# Altium PCB MAX_2870.PcbDoc (part 2 of 2)
Units mil, origin at the board's own origin, x right, y up, seen from the top; angles counter-clockwise.
Board outline 2360 x 1590 mil, 4 copper layers (Component Side, Ground Plane, Power Plane, Solder Side), stack 33.234 mil thick; 80 components, 61 nets, 332 pads, 500 vias.
Unrouted connection lines stored in the file: 26.
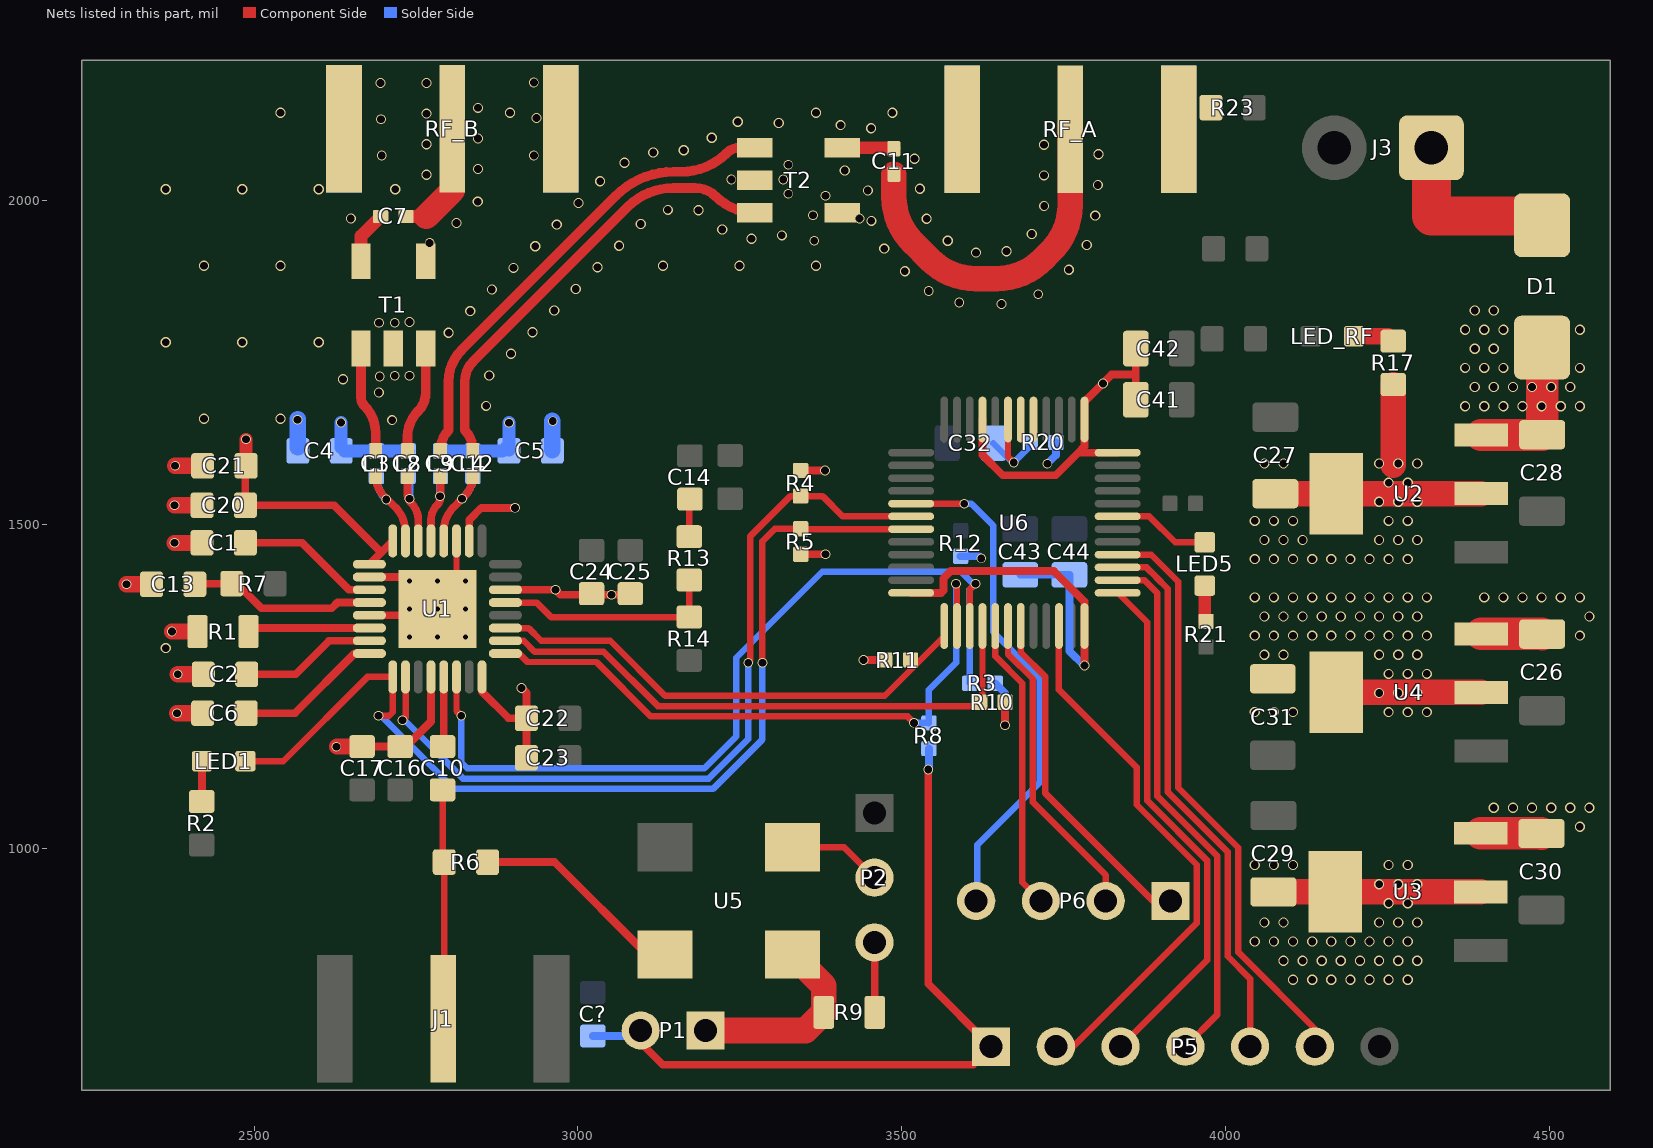
[diagram p4: the nets of this part, all layers, seen from the top]

## Via types
v1: diameter 15.75, hole 11.81, Component Side to Solder Side, 391 vias
v2: diameter 15, hole 12, Component Side to Solder Side, 96 vias
v3: diameter 19.68, hole 7.87, Component Side to Solder Side, 9 vias
v4: diameter 157.48, hole 118.11, Component Side to Solder Side, 4 vias

## Nets (pads, with @x,y where several pads share a name; then routed paths per layer and width w, separated by ;. In a path a pad name is that pad's centre, name@x,y a point inside that pad or via, vN(x,y) a via of type N, cw(c..) or ccw(c..) an arc to the next point about the centre after c; other vN are vias at no path point) (continued)
GND_RF: C1.2 C2.1 C4.2 C5.2 C6.1 C13.2 C20.2 C21.2 R1.2 R23.1 RF_A. RF_A.MP RF_B. RF_B.MP T1.1 T1.4 T2.1 T2.4 U1.11 U1.18 U1.21 U1.33 | length 726.3
  Component Side w10: v3(2783,1370) 2812.53,1399.53 U1.11@2812.53,1475.08
  Component Side w12: U1.21@2677.92,1360.16 2773.16,1360.16 v3(2783,1370) v3(2739.69,1413.31) 2733.79,1419.21 U1.18@2677.92,1419.21
  Component Side w25: v2(2303,1408) C13.2@2341.54,1408 ; v2(2373,1335) R1.2@2412.63,1335 ; v2(2376.93,1472) C1.2@2419.54,1472 ; v2(2377,1530) C20.2@2419.54,1530 ; v2(2378,1591) C21.2@2420.54,1591 ; v2(2381,1209) C6.1@2420.54,1209 ; v2(2382,1269) C2.1@2421.54,1269
  Solder Side w25: C4.2@2567.31,1619.33 v2@2567.31,1663.31 ; C5.2@2960.46,1615 v2@2960.46,1660.46
  other v1: 2363.62,1309.45 2713.1,1661.59 2422.68,1663.78 2540.79,1663.78 2858.28,1683.49 2692.72,1704.21 2637.28,1724.74 2863.16,1730.48 2896.56,1763.88 2363.62,1781.89 2481.73,1781.89 2599.84,1781.89 2800.39,1796.43 2929.97,1797.29 2833.8,1829.83 2963.38,1830.7 2867.2,1863.24 2996.78,1864.1 3504.88,1891.35 3758.14,1893.69 2900.61,1896.65 3030.19,1897.51 2422.68,1900 2540.79,1900 3131.34,1900 3249.45,1900 3367.56,1900 3614.74,1920.14 3661.94,1922.23 3473.15,1926.36 2934.02,1930.05 3063.6,1930.92 3785.82,1931.97 3571.23,1938.54 3267.99,1941.68 3314.96,1946.75 3700.83,1949.05 3222.95,1955.93 2967.42,1963.46 3097,1964.32 2812.52,1966.01 3453.21,1969.19 2649.48,1972.96 3538.48,1972.59 3798.92,1977.36 3138.92,1986.12 3186.16,1985.58 3719.92,1992.27 3000.83,1996.87 2845.35,1999 3447.86,2016.13 2363.62,2018.11 2481.73,2018.11 2599.84,2018.11 2717.95,2018.11 3528.14,2018.69 3803,2024.62 3034.24,2030.27 2766.24,2040.33 3719.86,2039.51 3412.07,2046.97 2845.76,2049.22 3071.86,2058.84 3519.85,2065.2 3803.92,2072 3116.3,2074.88 3163.42,2078.42 3719.86,2086.76 2766.24,2087.57 2845.76,2096.46 3206.63,2097.5 3452.72,2112.11 3405.74,2117.03 3310.26,2120.39 3246.84,2122.32 2766.24,2134.81 2540.79,2136.22 2895.12,2136.22 3367.56,2136.22 3485.67,2136.22 2845.76,2143.71 2766.24,2182.06
  other v2: 2961,1660 2567,1662 2694,1729 2717,1730 2740,1730 2693,1812 2717,1812 2740,1813 3654,1841 3589,1843 3711,1856 3541.68,1861 2771,1935 3365,1938.54 3435,1973 3363,1978 3382.47,2008 3325,2011 3237,2033 3317,2033 3325,2056 2697,2070 2932,2070 2696,2126 2936,2128 2695,2182 2932,2183
  other v3: 2739.69,1326.69 2783,1326.69 2826.31,1326.69 2739.69,1370 2826.31,1370 2783,1413.31 2826.31,1413.31
JTCK: P5.3 U6.37 | length 813.2
  Component Side w10: U6.37@3833.45,1394.73 3879,1349.18 3879,1074 3971.53,981.47 3971.53,827.53 P5.3@3838,694
JTDI: P5.4 U6.38 | length 829.1
  Component Side w10: U6.38@3833.45,1414.42 3874.94,1414.42 3895,1394.36 3895,1080.63 3987.53,988.1 3987.53,743.53 P5.4@3938,694
JTDO: P5.5 U6.39 | length 851.2
  Component Side w10: U6.39@3833.45,1434.1 3878.08,1434.1 3893,1419.18 3892.82,1419.18 3911,1401 3911,1087.25 4003.53,994.73 4003.53,833.47 4038,799 P5.5@4038,694
JTMS: P5.2 U6.34 | length 843.3
  Component Side w10: P5.2@3738,694 3764.61,694 3949.08,878.47 3955.53,884.92 3955.53,974.85 3863,1067.37 3863,1125.18 3742.9,1245.28 U6.34@3742.9,1343.55
JTRST#: P5.6 U6.40 | length 921.2
  Component Side w10: U6.40@3833.45,1453.79 3885.21,1453.79 3927,1412 3927,1093.88 4019.53,1001.35 4019.53,840.1 4144,715.63 4144,700 P5.6@4138,694
LD: LED1.A R5.1 U1.25 U6.19 | length 1572
  Component Side w10: LED1.A@2486.46,1134.87 2544.87,1134.87 2674.92,1264.92 U1.25@2714.1,1264.92 2714.1,1210.6 2708.5,1205 v2(2692,1205) ; v2(3285,1287) 3285,1474.46 3304.22,1493.68 R5.1@3344,1493.68 ; R5.1@3349,1497.32 3353.16,1493.16 U6.19@3514.55,1493.16
  Solder Side w10: v2(2692,1205) 2695.84,1205 2808.84,1092 3208.63,1092 3285,1168.37 v2(3285,1287)
LDout: P6.4 U6.17 | length 793.4
  Component Side w10: U6.17@3514.55,1532.53 v2(3596.53,1532.53)
  Solder Side w10: v2(3596.53,1532.53) 3607.64,1532.53 3641.5,1498.66 3641.5,1334.5 3713.43,1262.57 3713.43,1102.43 3617,1006 P6.4@3617,916
LO_N: C9.2 T2.3 | length 735.6
  Component Side w15: C9.2@2787.78,1614.02 2787.78,1615.65 cw(c2830.45,1615.65) 2800.28,1645.83 2800.28,1721.28 cw(c2868.72,1721.28) 2820.32,1769.68 3059.03,2008.39 cw(c3147.42,1920) 3147.42,2045 3159.52,2045 ccw(c3159.52,2145) 3230.23,2074.29 cw(c3248.85,2055.67) 3248.85,2082 T2.3@3273,2082
LO_P: C12.2 T2.5 | length 696.6
  Component Side w15: C12.2@2837.78,1614.02 2837.78,1615.65 ccw(c2795.1,1615.65) 2825.28,1645.83 2825.28,1721.28 cw(c2868.72,1721.28) 2838,1752 3076.71,1990.71 cw(c3147.42,1920) 3147.42,2020 3181.26,2020 cw(c3181.26,1974.9) 3213.15,2006.79 ccw(c3273,2066.64) T2.5@3273,1982
MISO: R3.1 U1.30 U6.27 | length 1364.1
  Component Side w10: U1.30@2812.53,1264.92 2812.53,1212.47 v2(2820,1205) ; U6.27@3605.1,1343.55 3605.1,1400.1 v2(3614,1409)
  Solder Side w10: v2(2820,1205) 2820,1133.14 2829.14,1124 3195.37,1124 3244.5,1173.13 3244.5,1294.66 3377.34,1427.5 3591.66,1427.5 3610.16,1409 v2(3614,1409) 3605.1,1400.1 R3.1@3605.1,1255
MOSI: R10.2 U1.2 U6.28 | length 892.9
  Component Side w10: U1.2@2888.08,1320.79 2916.21,1320.79 2933,1304 3039.57,1304 3123.57,1220 3609.32,1220 3624.79,1235.47 U6.28@3624.79,1343.55
NetC1_1: C1.1 U1.19 | length 221.5
  Component Side w12: C1.1@2486.46,1472 2574,1472 2646.47,1399.53 U1.19@2677.92,1399.53
NetC2_2: C2.2 U1.23 | length 210.9
  Component Side w12: C2.2@2488.46,1269 2564,1269 2615.79,1320.79 U1.23@2677.92,1320.79
NetC3_1: C3.1 L1.2 U1.15 | length 154.3
  Component Side w12: C3.1@2687.78,1574.65 ccw(c2729.84,1574.65) 2700.09,1544.91 2718,1527 cw(c2679.89,1488.89) 2733.79,1488.89 U1.15@2733.79,1475.08
  Solder Side w12: L1.2@2688.78,1574.65 ccw(c2738.09,1574.65) 2703.22,1539.78 v2(2704,1539)
NetC6_2: C6.2 U1.24 | length 228.6
  Component Side w12: C6.2@2487.46,1209 2563,1209 2655.1,1301.1 U1.24@2677.92,1301.1
NetC7_1: C7.1 T1.2 | length 81.6
  Component Side w20: T1.2@2665,1907 2665,1945.68 C7.1@2695.32,1976
NetC7_2: C7.2 RF_B.1 | length 191.5
  Component Side w20: C7.2@2734.68,1976 2766,1976 ; RF_B.1@2806,2016 RF_B.1@2806,2119.57
  Component Side w39.02: 2766,1976 RF_B.1@2806,2016
NetC8_1: C8.1 L2.2 U1.14 | length 139.3
  Component Side w12: C8.1@2736.78,1574.65 2736.78,1548.03 ccw(c2758.03,1548.03) 2743,1533 cw(c2717.72,1507.72) 2753.47,1507.72 U1.14@2753.47,1475.08
  Solder Side w12: L2.2@2737.78,1574.65 cw(c2732.41,1569.28) 2740,1569.28 v2(2740,1540)
NetC9_1: C9.1 L3.2 U1.13 | length 134.3
  Component Side w12: U1.13@2773.16,1475.08 2773.16,1507.24 cw(c2806.76,1507.24) 2783,1531 ccw(c2771.47,1542.53) 2787.78,1542.53 C9.1@2787.78,1574.65
  Solder Side w12: v2(2787,1544) 2787,1572.78 cw(c2789.65,1572.78) L3.2@2787.78,1574.65
NetC10_1: C10.1 J1.1 R6.2 | length 363.8
  Component Side w10: C10.1@2791,1090.54 2791,981.54 R6.2@2793.54,979 2793.54,736.89 J1.1@2800,730.43
NetC10_2: C10.2 U1.29 | length 108.2
  Component Side w12: C10.2@2791,1157.46 2792.84,1159.31 U1.29@2792.84,1264.92
NetC11_1: C11.1 T2.2 | length 80.4
  Component Side w19.68: T2.2@3408,2082 3484.83,2082 cw(c3484.83,2077.51) C11.1@3488,2080.68
NetC11_2: C11.2 RF_A.1 | length 562.7
  Component Side w39.37: C11.2@3488,2041.32 3488,2006.42 ccw(c3588,2006.42) 3517.29,1935.71 3543.71,1909.29 ccw(c3614.42,1980) 3614.42,1880 3646.58,1880 ccw(c3646.58,1980) 3717.29,1909.29 3730.71,1922.71 ccw(c3660,1993.42) 3760,1993.42 RF_A.1@3760,2118.57
NetC12_1: C12.1 L4.2 U1.12 | length 153.9
  Component Side w12: U1.12@2792.84,1475.08 2792.84,1490.41 cw(c2844.59,1490.41) 2808,1527 v2(2821,1540) 2825.14,1544.14 ccw(c2794.62,1574.65) C12.1@2837.78,1574.65
  Solder Side w12: v2(2821,1540) 2825.14,1544.14 ccw(c2794.62,1574.65) L4.2@2837.78,1574.65
NetC14_2: C14.2 R13.1 | length 58.5
  Component Side w10: R13.1@3172,1481.46 3172,1538.54 C14.2@3173,1539.54
NetC33_2: U6.5
NetC34_2: U6.6 | length 14.3
  Component Side w10: U6.6@3683.84,1662.45 U6.6@3683.84,1676.71
NetD1_A: D1.A J3.1 | length 276.5
  Component Side w60: J3.1@4318,2082 4318,1976.49 D1.A@4489,1976.49
NetLED1_K: LED1.K R2.2 | length 62.6
  Component Side w12: R2.2@2419,1072.46 2419.54,1073 LED1.K@2419.54,1134.87
NetLED5_A: LED5.A U6.43 | length 151.1
  Component Side w10: U6.43@3833.45,1512.84 3882.46,1512.84 3922.38,1472.93 LED5.A@3968,1472.93
NetLED5_K: LED5.K R21.1 | length 57.3
  Component Side w20: LED5.K@3968,1406 3968,1350.68 R21.1@3970,1350.68
NetLED_DIG_A: 
NetLED_PLL_A: 
NetLED_RF_A: LED_RF.A R17.2 | length 63.7
  Component Side w25: LED_RF.A@4198.46,1791 4251.46,1791 R17.2@4259,1783.46
NetP1_1: P1.1 R9.1 U5.2 | length 303.5
  Component Side w40: P1.1@3197,719 3351.63,719 R9.1@3379.63,747 3379.63,788.12 U5.2@3331.43,836.32
NetP2_2: P2.2 U5.3 | length 145.9
  Component Side w10: U5.3@3331.43,1001.68 3411.32,1001.68 P2.2@3458,955
NetP2_3: P2.3 R9.2 | length 108.2
  Component Side w12: P2.3@3458,855 3458.37,854.63 R9.2@3458.37,747
NetR1_1: R1.1 U1.22 | length 188.8
  Component Side w12: R1.1@2491.37,1335 2496.84,1340.47 U1.22@2677.92,1340.47
NetR6_1: R6.1 U5.1 | length 333.2
  Component Side w12: R6.1@2860.46,979 2964,979 3106.68,836.32 U5.1@3134.57,836.32
RESET: C32.2 R20.1 U6.7 | length 155.8
  Component Side w10: U6.7@3664.16,1662.45 3664.16,1604.84 v2(3673,1596)
  Solder Side w10: C32.2@3641.43,1626 3671.43,1596 v2(3673,1596) 3698.75,1621.75 R20.1@3698.75,1627
RF_EN: R4.1 U1.26 U6.18 | length 1267.1
  Component Side w10: v2(2729,1198) 2733.79,1202.79 U1.26@2733.79,1264.92 ; v2(3263,1287) 3266.5,1290.5 3266.5,1482.5 3328.32,1544.32 R4.1@3344,1544.32 3377.68,1544.32 3409.16,1512.84 U6.18@3514.55,1512.84
  Solder Side w10: v2(2729,1198) 2732.51,1198 2822.51,1108 3202,1108 3263,1169 v2(3263,1287)
RF_N: C3.2 T1.3 | length 164.1
  Component Side w15: T1.3@2665,1772 2665,1696.07 ccw(c2682.07,1696.07) 2670,1684 cw(c2627.09,1641.09) 2687.78,1641.09 C3.2@2687.78,1614.02
RF_P: C8.2 T1.5 | length 165.5
  Component Side w15: C8.2@2736.78,1614.02 2736.78,1635.83 cw(c2792.17,1635.83) 2753,1675 ccw(c2724.03,1703.97) 2765,1703.97 T1.5@2765,1772
RX: P6.1 U6.31 | length 536.1
  Component Side w10: U6.31@3683.84,1343.55 3683.84,1303.12 3722,1264.96 3722,1085 3888,919 P6.1@3915,919
SCK: R8.2 U1.1 U6.26 | length 997.2
  Component Side w10: U1.1@2888.08,1301.1 2908.9,1301.1 2922,1288 3028.57,1288 3112.57,1204 3509,1204 v2(3519,1194) ; v2(3584,1409) 3585.42,1407.58 U6.26@3585.42,1343.55
  Solder Side w10: v2(3519,1194) 3541.68,1194 R8.2@3542,1193.68 3542,1245 3584,1287 v2(3584,1409)
SS: R11.2 U1.3 U6.25 | length 774.7
  Component Side w10: U1.3@2888.08,1340.47 2923.53,1340.47 2943.21,1320.79 3049.79,1320.79 3134.57,1236 3474,1236 3565.73,1327.73 U6.25@3565.73,1343.55
SW: R13.2 R14.1 U1.5 | length 350.3
  Component Side w10: U1.5@2888.08,1379.84 2936.16,1379.84 2958.54,1357.46 R14.1@3172,1357.46 R13.2@3172,1414.54
trig: P6.3 U6.29 | length 453.8
  Component Side w10: U6.29@3644.47,1343.55 3644.47,1297.23 3686.32,1255.39 3686.32,947.68 P6.3@3715,919
TUNE: C13.1 R7.1 U1.20 | length 289.3
  Component Side w12: C13.1@2408.46,1408 2409.46,1409 R7.1@2465.54,1409 2473.37,1409 2511.37,1371 2620,1371 2628.84,1379.84 U1.20@2677.92,1379.84
TX: P6.2 U6.30 | length 487
  Component Side w10: U6.30@3664.16,1343.55 3664.16,1300.18 3702.32,1262.02 3702.32,1071.68 3815,959 P6.2@3815,919
VCC_12V: C26.1 C28.1 C30.1 D1.K U2.3 U3.3 U4.3 | length 430.6
  Component Side w50: U3.3@4394.2,1023.55 4486.8,1023.55 cw(c4486.8,1021.86) C30.1@4488,1023.06 ; U4.3@4395.2,1331.55 4487.8,1331.55 cw(c4487.8,1329.86) C26.1@4489,1331.06 ; U2.3@4395.2,1638.55 4489,1638.55 D1.K@4489,1787.51
  other v1: 4547.25,1033.47 4547.25,1033.47 4414.38,1062.99 4414.38,1062.99 4443.9,1062.99 4443.9,1062.99 4473.43,1062.99 4473.43,1062.99 4502.96,1062.99 4502.96,1062.99 4532.49,1062.99 4532.49,1062.99 4562.01,1062.99 4562.01,1062.99 4547.25,1328.74 4547.25,1328.74 4562.01,1358.27 4562.01,1358.27 4399.61,1387.8 4399.61,1387.8 4429.14,1387.8 4429.14,1387.8 4458.67,1387.8 4458.67,1387.8 4488.2,1387.8 4488.2,1387.8 4517.72,1387.8 4517.72,1387.8 4547.25,1387.8 4547.25,1387.8 4370.08,1683.07 4399.61,1683.07 4429.14,1683.07 4458.67,1683.07 4488.2,1683.07 4517.72,1683.07 4547.25,1683.07 4384.85,1712.6 4414.38,1712.6 4443.9,1712.6 4473.43,1712.6 4502.96,1712.6 4532.49,1712.6 4370.08,1742.13 4370.08,1742.13 4370.08,1742.13 4399.61,1742.13 4399.61,1742.13 4399.61,1742.13 4429.14,1742.13 4429.14,1742.13 4429.14,1742.13 4547.25,1742.13 4547.25,1742.13 4547.25,1742.13 4384.85,1771.66 4384.85,1771.66 4384.85,1771.66 4414.38,1771.66 4414.38,1771.66 4414.38,1771.66 4370.08,1801.18 4370.08,1801.18 4370.08,1801.18 4399.61,1801.18 4399.61,1801.18 4399.61,1801.18 4429.14,1801.18 4429.14,1801.18 4429.14,1801.18 4547.25,1801.18 4547.25,1801.18 4547.25,1801.18 4384.85,1830.71 4384.85,1830.71 4384.85,1830.71 4414.38,1830.71 4414.38,1830.71 4414.38,1830.71
VCC_DIG: C16.1 C17.1 C31.1 C41.2 C42.2 C43.2 C44.2 C?.1 P1.2 P5.1 R3.2 R4.2 R5.2 R8.1 R10.1 R11.1 R12.1 R20.2 U1.28 U4.2 U4.4 U6.1 U6.9 U6.24 U6.36 U6.48 | length 3091.8
  Component Side w12: C17.1@2666.68,1157.46 C16.1@2725.41,1157.46 2734.46,1157.46 2773.16,1196.16 U1.28@2773.16,1264.92 ; P1.2@3097,719 3097,700 3131,666 3610,666 P5.1@3638,694 3541,791 v2(3541,1122) ; R5.2@3344,1454.32 v2(3382.47,1454.32) ; R4.2@3344,1583.68 v2(3381.68,1583.68) ; v2(3441,1291) R11.1@3474.32,1291 ; U6.24@3514.55,1394.73 3560.92,1394.73 3564.5,1398.32 3564.5,1417.08 3575.92,1428.5 3735.08,1428.5 3782.27,1381.31 U6.36@3782.27,1343.55 v2(3782.27,1282.46) ; U6.9@3624.79,1662.45 3624.79,1607.68 3655.97,1576.5 3737.99,1576.5 3772.75,1611.27 ; v2(3659.68,1190.32) R10.1@3659.68,1226 ; U6.48@3833.45,1611.27 3772.75,1611.27 ; 3860,1732 3824.18,1732 3782.27,1690.09 U6.1@3782.27,1662.45 3782.27,1620.78 3772.75,1611.27 ; C41.2@3861.57,1693 C42.2@3861.57,1772
  Component Side w25: v2@2628,1157.46 C17.1@2666.68,1157.46
  Component Side w39.37: U4.4@4170.8,1241 U4.2@4395.2,1241
  Solder Side w12: C?.1@3023,710.54 3088.54,710.54 P1.2@3097,719 ; v2@3542,1121 R8.1@3542,1154.32 ; R12.1@3591,1451.32 3619.68,1451.32 v2(3623,1448) ; R3.2@3644.47,1255 3659.68,1239.79 v2(3659.68,1190.32) ; C43.2@3683,1422.57 C44.2@3759,1422.57 3759,1305 v2@3782,1282 ; v2(3725,1594) 3738.12,1607.12 R20.2@3738.12,1627
  other v1: 4045.28,1210.63 4074.81,1210.63 4104.34,1210.63 4251.97,1210.63 4281.5,1210.63 4311.03,1210.63 4237.21,1240.16 4266.74,1240.16 4296.27,1240.16 4251.97,1269.69 4281.5,1269.69 4311.03,1269.69 4060.05,1299.21 4089.57,1299.21 4237.21,1299.21 4266.74,1299.21 4296.27,1299.21 4045.28,1328.74 4074.81,1328.74 4104.34,1328.74 4133.86,1328.74 4163.39,1328.74 4192.92,1328.74 4222.45,1328.74 4251.97,1328.74 4281.5,1328.74 4311.03,1328.74 4060.05,1358.27 4089.57,1358.27 4119.1,1358.27 4148.63,1358.27 4178.16,1358.27 4207.68,1358.27 4237.21,1358.27 4266.74,1358.27 4296.27,1358.27 4045.28,1387.8 4074.81,1387.8 4104.34,1387.8 4133.86,1387.8 4163.39,1387.8 4192.92,1387.8 4222.45,1387.8 4251.97,1387.8 4281.5,1387.8 4311.03,1387.8
  other v2: 2627,1157 3811,1718
VCC_PLL: C22.1 C23.1 C24.1 C25.1 C29.1 U1.6 U1.10 U1.32 U3.2 U3.4 | length 847.2
  Component Side w12: U1.10@2832.21,1475.08 2832.21,1507.21 2851,1526 v2(2903,1526) ; U1.32@2851.9,1264.92 2851.9,1242.1 2893,1201 C22.1@2920.54,1201 ; U1.6@2888.08,1399.53 v2(2965.47,1399.53) 2973,1392 3079.46,1392 C25.1@3081,1393.54 ; v2(2913,1248) 2920.54,1240.46 C22.1@2920.54,1201 ; C23.1@2920.54,1140 C22.1@2920.54,1201
  Component Side w39.37: C29.1@4074,932.94 4074.05,933 U3.4@4169.8,933 U3.2@4394.2,933
  other v1: 4104.34,797.25 4133.86,797.25 4163.39,797.25 4192.92,797.25 4222.45,797.25 4251.97,797.25 4281.5,797.25 4089.57,826.77 4119.1,826.77 4148.63,826.77 4178.16,826.77 4207.68,826.77 4237.21,826.77 4266.74,826.77 4296.27,826.77 4045.28,856.3 4074.81,856.3 4104.34,856.3 4133.86,856.3 4163.39,856.3 4192.92,856.3 4222.45,856.3 4251.97,856.3 4281.5,856.3 4060.05,885.83 4089.57,885.83 4237.21,885.83 4266.74,885.83 4296.27,885.83 4251.97,915.36 4281.5,915.36 4237.21,944.88 4266.74,944.88 4296.27,944.88 4045.28,974.41 4074.81,974.41 4104.34,974.41 4251.97,974.41 4281.5,974.41
  other v2: 3052,1392
VCC_RF: C4.1 C5.1 C20.1 C21.1 C27.1 L1.1 L2.1 L3.1 L4.1 R17.1 U1.16 U1.17 U2.2 U2.4 | length 1132.9
  Component Side w12: C21.1@2487.46,1591 2486.46,1590 C20.1@2486.46,1530 2623.32,1530 2696.17,1457.15 ; U1.17@2677.92,1438.9 2696.17,1457.15 ; U1.16@2714.1,1475.08 2696.17,1457.15
  Component Side w20: C21.1@2487.46,1591 v2(2487.46,1632)
  Component Side w39.37: C27.1@4077,1547.94 4077.05,1548 U2.4@4170.8,1548 U2.2@4395.2,1548 ; 4259,1592 R17.1@4259,1716.54
  Solder Side w20: v2(2634.24,1658) 2634.24,1619.33 2639.56,1614.02 L1.1@2688.78,1614.02 L2.1@2737.78,1614.02 ; L3.1@2787.78,1614.02 L4.1@2837.78,1614.02 2883.89,1614.02 2889.2,1619.33 2893.54,1615 v2(2893.54,1657.54)
  other v1: 4045.28,1446.85 4074.81,1446.85 4104.34,1446.85 4133.86,1446.85 4163.39,1446.85 4192.92,1446.85 4222.45,1446.85 4251.97,1446.85 4281.5,1446.85 4060.05,1476.38 4089.57,1476.38 4119.1,1476.38 4237.21,1476.38 4266.74,1476.38 4296.27,1476.38 4045.28,1505.91 4074.81,1505.91 4104.34,1505.91 4251.97,1505.91 4281.5,1505.91 4237.21,1535.44 4266.74,1535.44 4296.27,1535.44 4251.97,1564.96 4281.5,1564.96 4060.05,1594.49 4089.57,1594.49 4237.21,1594.49 4266.74,1594.49 4296.27,1594.49
pads on no net: C1.0 C2.0 C3.0 C4.0 C5.0 C6.0 C7.0 C8.0 C9.0 C10.0 C11.0 C12.0 C13.0 C14.0 C15.0 C16.0 C17.0 C20.0 C21.0 C22.0 C23.0 C24.0 C25.0 C26.0 C27.0 C28.0 C29.0 C30.0 C31.0 C32.0 C41.0 C42.0 C43.0 C44.0 C?.0 D1.0 L1.0 L2.0 L3.0 L4.0 LED1.0 LED5.0 LED_RF.0 R1.0 R2.0 R3.0 R4.0 R5.0 R6.0 R7.0 R8.0 R9.0 R10.0 R11.0 R12.0 R13.0 R14.0 R15.0 R16.0 R17.0 R20.0 R21.0 R22.0 R23.0 U6.2 U6.3 U6.4 U6.10 U6.11 U6.12 U6.13 U6.14 U6.15 U6.16 U6.21 U6.22 U6.32 U6.33 U6.41 U6.42 U6.45 U6.46
copper on no net:
  other v4: 2329,722 4499,722 2329,2122 4499,2122

## Polygon pours and split planes (outlines as drawn)
GND_PLL on Component Side "Component Side-GND_PLL" (solid, pour order 14): 3281,1827 3742.67,1827 3944.33,2028.67 4006,2028.67 4006,1903 3824.18,1732 3281,1732 3281,1102 2796,1102 2796,1296 2863.1,1296 2863.1,1439 2832.21,1439 2832.21,1504.11 3013,1504.11 3013,1742 3098,1827
GND_DIG on Component Side "Component Side-GND_DIG" (solid, remove dead copper, pour order 20): 2234,627 4209,627 4209,754 4005,754 4005,1825 3293,1825 3293,1095 2778.19,1095 2778.19,1169 2234,1169
GND_RF on Component Side "Component Side-GND_RF" (solid, pour order 12): 2232,2217 4006,2217 4006,2014.49 3978,1995 3751,1837 3081.03,1837 3000,1751.57 3000,1514 2819,1514 2819,1431 2853,1431 2853,1307 2708.5,1307 2708.5,1187 2232,1187
GND on Component Side "Component Side-GND" (solid, remove dead copper, pour order 22): 4024,2217 4024,630 4594,630 4594,2217
VCC_12V on Component Side "Component Side-VCC_12V" (solid, pour order 10): 4378,1090.53 4378,1002 4573,1002 4573,1090.53
VCC_12V on Component Side "Component Side-VCC_12V 1" (solid, pour order 8): 4384,1399.53 4384,1311 4579,1311 4579,1399.53
VCC_12V on Component Side "Component Side-VCC_12V 2" (solid, pour order 6): 4349,1871 4349,1619 4569,1619 4569,1873
VCC_PLL on Component Side "Component Side-VCC_PLL" (solid, pour order 4): 4014,1010 4014,775 4308,775 4308,1010
VCC_DIG on Component Side "Component Side-VCC_DIG" (solid, pour order 2): 4013,1407.58 4013,1176 4336,1176 4336,1407.58
VCC_RF on Component Side "Component Side-VCC_RF" (solid, pour order 0): 4012,1626 4012,1419.78 4311,1419.78 4311,1626
no net on Solder Side (solid, remove dead copper, pour order 24): 4311,1626
VCC_DIG on Power Plane (split plane): 3927.9,1615 3927.9,1416 3928.29,1414.05 3929.4,1412.4 3931.05,1411.29 3933,1410.9 4332.9,1410.9 4332.9,1110.1 3866,1110.1 3864.05,1109.71 3862.4,1108.6 3861.29,1106.95 3860.9,1105 3860.9,997.1 2534.1,997.1 2534.1,1272.9 2863.9,1272.9 2863.9,1139.87 2863.29,1138.95 2862.9,1137 2862.9,1099 2863.29,1097.05 2864.4,1095.4 2866.05,1094.29 2868,1093.9 3287,1093.9 3288.95,1094.29 3290.6,1095.4 3291.71,1097.05 3292.1,1099 3292.1,1303 3292.1,1826.9 3927.9,1826.9
VCC_12V on Power Plane (split plane): 4491,2122 4573.9,2122 4573.9,706 4511,706 4511,647.1 4251.31,647.1 4341.6,737.4 4342.71,739.05 4343.1,741 4343.1,1416 4342.71,1417.95 4342.07,1418.9 4340.1,1800.03 4339.9,1800.97 4339.72,1801.92 4339.71,1801.95 4339.7,1801.98 4339.16,1802.77 4338.63,1803.58 4338.6,1803.6 4338.59,1803.62 4337.78,1804.16 4336.98,1804.7 4336.95,1804.7 4336.93,1804.72 4335.98,1804.9 4335.03,1805.1 4017.1,1807.07 4017.1,2196.9 4491,2196.9
VCC_RF on Power Plane (split plane): 4006.9,1802 4007.09,1801.04 4007.28,1800.08 4007.29,1800.06 4007.29,1800.05 4007.83,1799.24 4008.37,1798.42 4008.39,1798.41 4008.4,1798.4 4009.21,1797.85 4010.02,1797.3 4010.04,1797.3 4010.05,1797.29 4011.01,1797.1 4011.97,1796.9 4329.93,1794.93 4331.87,1421.1 3938.1,1421.1 3938.1,1615 3938.1,1832 3937.71,1833.95 3936.6,1835.6 3934.95,1836.71 3933,1837.1 3196,1837.1 3194.05,1836.71 3192.4,1835.6 3191.29,1833.95 3190.9,1832 3190.9,1749.1 3013,1749.1 3011.05,1748.71 3009.4,1747.6 3004.4,1742.61 3004.4,1742.6 2831.89,1570.1 2821,1570.1 2819.05,1569.71 2817.4,1568.6 2816.29,1566.95 2815.9,1565 2815.9,1508.1 2577,1508.1 2575.05,1507.71 2573.4,1506.6 2572.29,1504.95 2571.9,1503 2571.9,1480.1 2254.1,1480.1 2254.1,2130 2323,2130 2323,2196.9 4006.9,2196.9
VCC_PLL on Power Plane (split plane): 3281.9,1303 3281.9,1278 3281.9,1104.1 2873.1,1104.1 2873.1,1134.13 2873.71,1135.05 2874.1,1137 2874.1,1278 2873.71,1279.95 2872.6,1281.6 2870.95,1282.71 2869,1283.1 2529,1283.1 2527.05,1282.71 2525.4,1281.6 2524.29,1279.95 2523.9,1278 2523.9,992 2524.29,990.05 2525.4,988.4 2527.05,987.29 2529,986.9 3866,986.9 3867.95,987.29 3869.6,988.4 3870.71,990.05 3871.1,992 3871.1,1099.9 4332.9,1099.9 4332.9,743.11 4236.89,647.1 2316,647.1 2316,705 2254.1,705 2254.1,1469.9 2577,1469.9 2578.95,1470.29 2580.6,1471.4 2581.71,1473.05 2582.1,1475 2582.1,1497.9 2821,1497.9 2822.95,1498.29 2824.6,1499.4 2825.71,1501.05 2826.1,1503 2826.1,1559.9 2834,1559.9 2835.95,1560.29 2837.6,1561.4 3011.6,1735.4 3011.61,1735.4 3015.11,1738.9 3196,1738.9 3197.95,1739.29 3199.6,1740.4 3200.71,1742.05 3201.1,1744 3201.1,1826.9 3281.9,1826.9
GND_PLL on Ground Plane (split plane): 4005.9,1902.11 3838.84,1735.05 3286,1735.05 3284.05,1734.66 3282.4,1733.56 3281.29,1731.9 3280.9,1729.95 3280.9,1103.1 2797.1,1103.1 2797.1,1295.9 2858,1295.9 2859.95,1296.29 2861.6,1297.4 2862.71,1299.05 2863.1,1301 2863.1,1436 2862.71,1437.95 2861.6,1439.6 2859.95,1440.71 2858,1441.1 2829.1,1441.1 2829.1,1444 2829.1,1503.9 3067,1503.9 3068.95,1504.29 3070.6,1505.4 3071.71,1507.05 3072.1,1509 3071.71,1510.95 3070.6,1512.6 3068.95,1513.71 3067,1514.1 2944.1,1514.1 2944.1,1722.89 3042.43,1821.22 3043.76,1820.34 3045.71,1819.95 3750.05,1819.95 3752,1820.34 3753.65,1821.44 3956.11,2023.9 4005.9,2023.9
GND on Ground Plane (split plane): 4499,2122 4573.9,2122 4573.9,722 4499,722 4499,647.1 4212.11,647.1 4018.05,841.16 4018.05,1802 4018.05,1872.05 4018.05,1898.05 4017.66,1900 4016.56,1901.65 4016.1,1901.96 4016.1,2025.09 4016.56,2025.4 4017.66,2027.05 4018.05,2029 4017.66,2030.95 4016.56,2032.6 4016.1,2032.91 4016.1,2196.9 4499,2196.9
GND_RF on Ground Plane (split plane): 4005.9,2034.1 3954,2034.1 3952.05,2033.71 3950.4,2032.6 3747.94,1830.15 3045.71,1830.15 3045,1830.01 3044.6,1830.6 3042.95,1831.71 3041,1832.1 3039.05,1831.71 3037.4,1830.6 2935.4,1728.6 2934.29,1726.95 2933.9,1725 2933.9,1514.1 2824,1514.1 2822.05,1513.71 2820.4,1512.6 2819.29,1510.95 2818.9,1509 2818.9,1444 2818.9,1436 2819.29,1434.05 2820.4,1432.4 2822.05,1431.29 2824,1430.9 2852.9,1430.9 2852.9,1306.1 2709,1306.1 2707.05,1305.71 2705.4,1304.6 2704.29,1302.95 2703.9,1301 2703.9,1182.1 2254.1,1182.1 2254.1,2122 2329,2122 2329,2196.9 4005.9,2196.9
GND_DIG on Ground Plane (split plane): 4007.85,1877.91 4007.4,1877.6 4006.29,1875.95 4005.9,1874 4006.29,1872.05 4007.4,1870.4 4007.85,1869.94 4007.85,1802 4007.85,839.05 4008.24,837.1 4009.35,835.44 4197.69,647.1 2329,647.1 2329,722 2254.1,722 2254.1,1171.9 2709,1171.9 2710.95,1172.29 2712.6,1173.4 2713.71,1175.05 2714.1,1177 2714.1,1295.9 2786.9,1295.9 2786.9,1098 2787.29,1096.05 2788.4,1094.4 2790.05,1093.29 2792,1092.9 3286,1092.9 3287.95,1093.29 3289.6,1094.4 3290.71,1096.05 3291.1,1098 3291.1,1724.85 3840.95,1724.85 3842.9,1725.24 3844.56,1726.35 4007.85,1889.64

## Other copper
Solder Side:
  rectangle net GND_RF: 3567,2012 3955,2209
  rectangle net GND_RF: 2612,2012 3000,2209
  rectangle net GND_DIG: 2597,634 2988,835
Ground Plane (plane layer: these items are gaps in the copper):
  rectangle: 2234,2122 2329,2217
  rectangle: 2234,627 2329,722
  rectangle: 4499,627 4594,722
  rectangle: 4499,2122 4594,2217
  lines w10: 2234,1177 2709,1177 2709,1301 2858,1301 2858,1436 2824,1436 2824,1444 2824,1509 2939,1509 ; 2760,2217 3945,2217 ; 2801,1301 2792,1301 2792,1098 3286,1098 3286,1729.95 3840.95,1729.95 4011,1900 4011,2217 ; 3041,1827 2939,1725 2939,1509 ; 3045.71,1825.05 3750.05,1825.05 3954,2029 4012.95,2029 ; 3067,1509 2939,1509 ; 4011,1874 4012.95,1872.05 ; 4012.95,1898.05 4012.95,1872.05 ; 4225,627 4012.95,839.05 4012.95,1802 4012.95,1872.05
Power Plane (plane layer: these items are gaps in the copper):
  rectangle: 4511,627 4594,706
  rectangle: 4491,2122 4594,2215
  rectangle: 2230,627 2316,705
  rectangle: 2234,2130 2323,2217
  rectangle: 2723,1309 2843,1431
  lines w10: 3287,1278 3287,1831 ; 3287,1303 3287,1099 2868,1099 2868,1137 2869,1137 2869,1278 2865,1278 2812,1278 2529,1278 2529,992 3866,992 3866,1105 4337,1105 ; 4224,627 4338,741 4338,1416 3933,1416 3933,1615 3933,1832 3787,1832 3196,1832 3196,1744 3013,1744 3008,1739 2834,1565 2821,1565 2821,1503 2577,1503 2577,1475 2234,1475 2234,2217 4012,2217 4012,1802 4335,1800 4337,1414

## Silkscreen, mask and mechanical layers (free items; w line width, h text height)
Top Overlay:
  drawing of 3 lines, arcs and shapes, not listed
  text "PLL" at 2412.63,1702 h60
  text "LDo" at 3616,985 h40 r45
  text "trg" at 3713,979.75 h40 r45
  text "SCK" at 3823,754 h40 r45
  text "rst" at 4125,754 h40 r45
  text "SWD" at 3731,753 h40 r45
Bottom Overlay:
  text "Nuclearrambo.com" at 3340,905 h60
Top Solder:
  lines w15: 2800.28,1646.83 2800.28,1722.28 ; 2800.28,1721.28 cw(c2868.72,1721.28) 2820.32,1769.68 3059.03,2008.39 cw(c3147.42,1920) 3147.42,2045 ; 2825.28,1645.83 2825.28,1721.28 cw(c2868.72,1721.28) 2838,1752 3076.71,1990.71 cw(c3147.42,1920) 3147.42,2020 3181.26,2020 cw(c3181.26,1974.9) 3213.15,2006.79 ccw(c3273,2066.64) 3273,1982 ; 3159.52,2045 ccw(c3159.52,2145) 3230.23,2074.29 cw(c3248.85,2055.67) 3248.85,2082
  lines w39.02: 2766,1975.58 2806,2015.58
  lines w39.37: 3488,2006 ccw(c3588,2006) 3517.29,1935.29 3543.71,1908.87 ccw(c3614.42,1979.58) 3614.42,1879.58 3646.58,1879.58 ccw(c3646.58,1979.58) 3717.29,1908.87 3730.71,1922.29 ccw(c3660,1993) 3760,1993
Bottom Solder:
  rectangle: 2711,1307 2853,1439
Mechanical 1:
  the board outline again, w10
Mechanical 13:
  lines w10: 2724,2793 2725,2793

## Text inside footprints (layer, text, board x,y; h text height)
J1: Mechanical 3 "Board Edge" at 3110.9,638.57 h7.87 r180
RF_A: Mechanical 3 "Board Edge" at 3441.72,2209 h7.87
RF_B: Mechanical 3 "Board Edge" at 2487.1,2210 h7.87